# Altium PCB CT310高端控制盒核心板电路V1.3.PcbDoc (part 8 of 10)
Units mil, origin at the board's own origin, x right, y up, seen from the top; angles counter-clockwise.
Board outline 3735.76 x 4625 mil, 2 copper layers (TOP, BOTTOM), stack 10.4 mil thick; 198 components, 362 nets, 1085 pads, 352 vias.
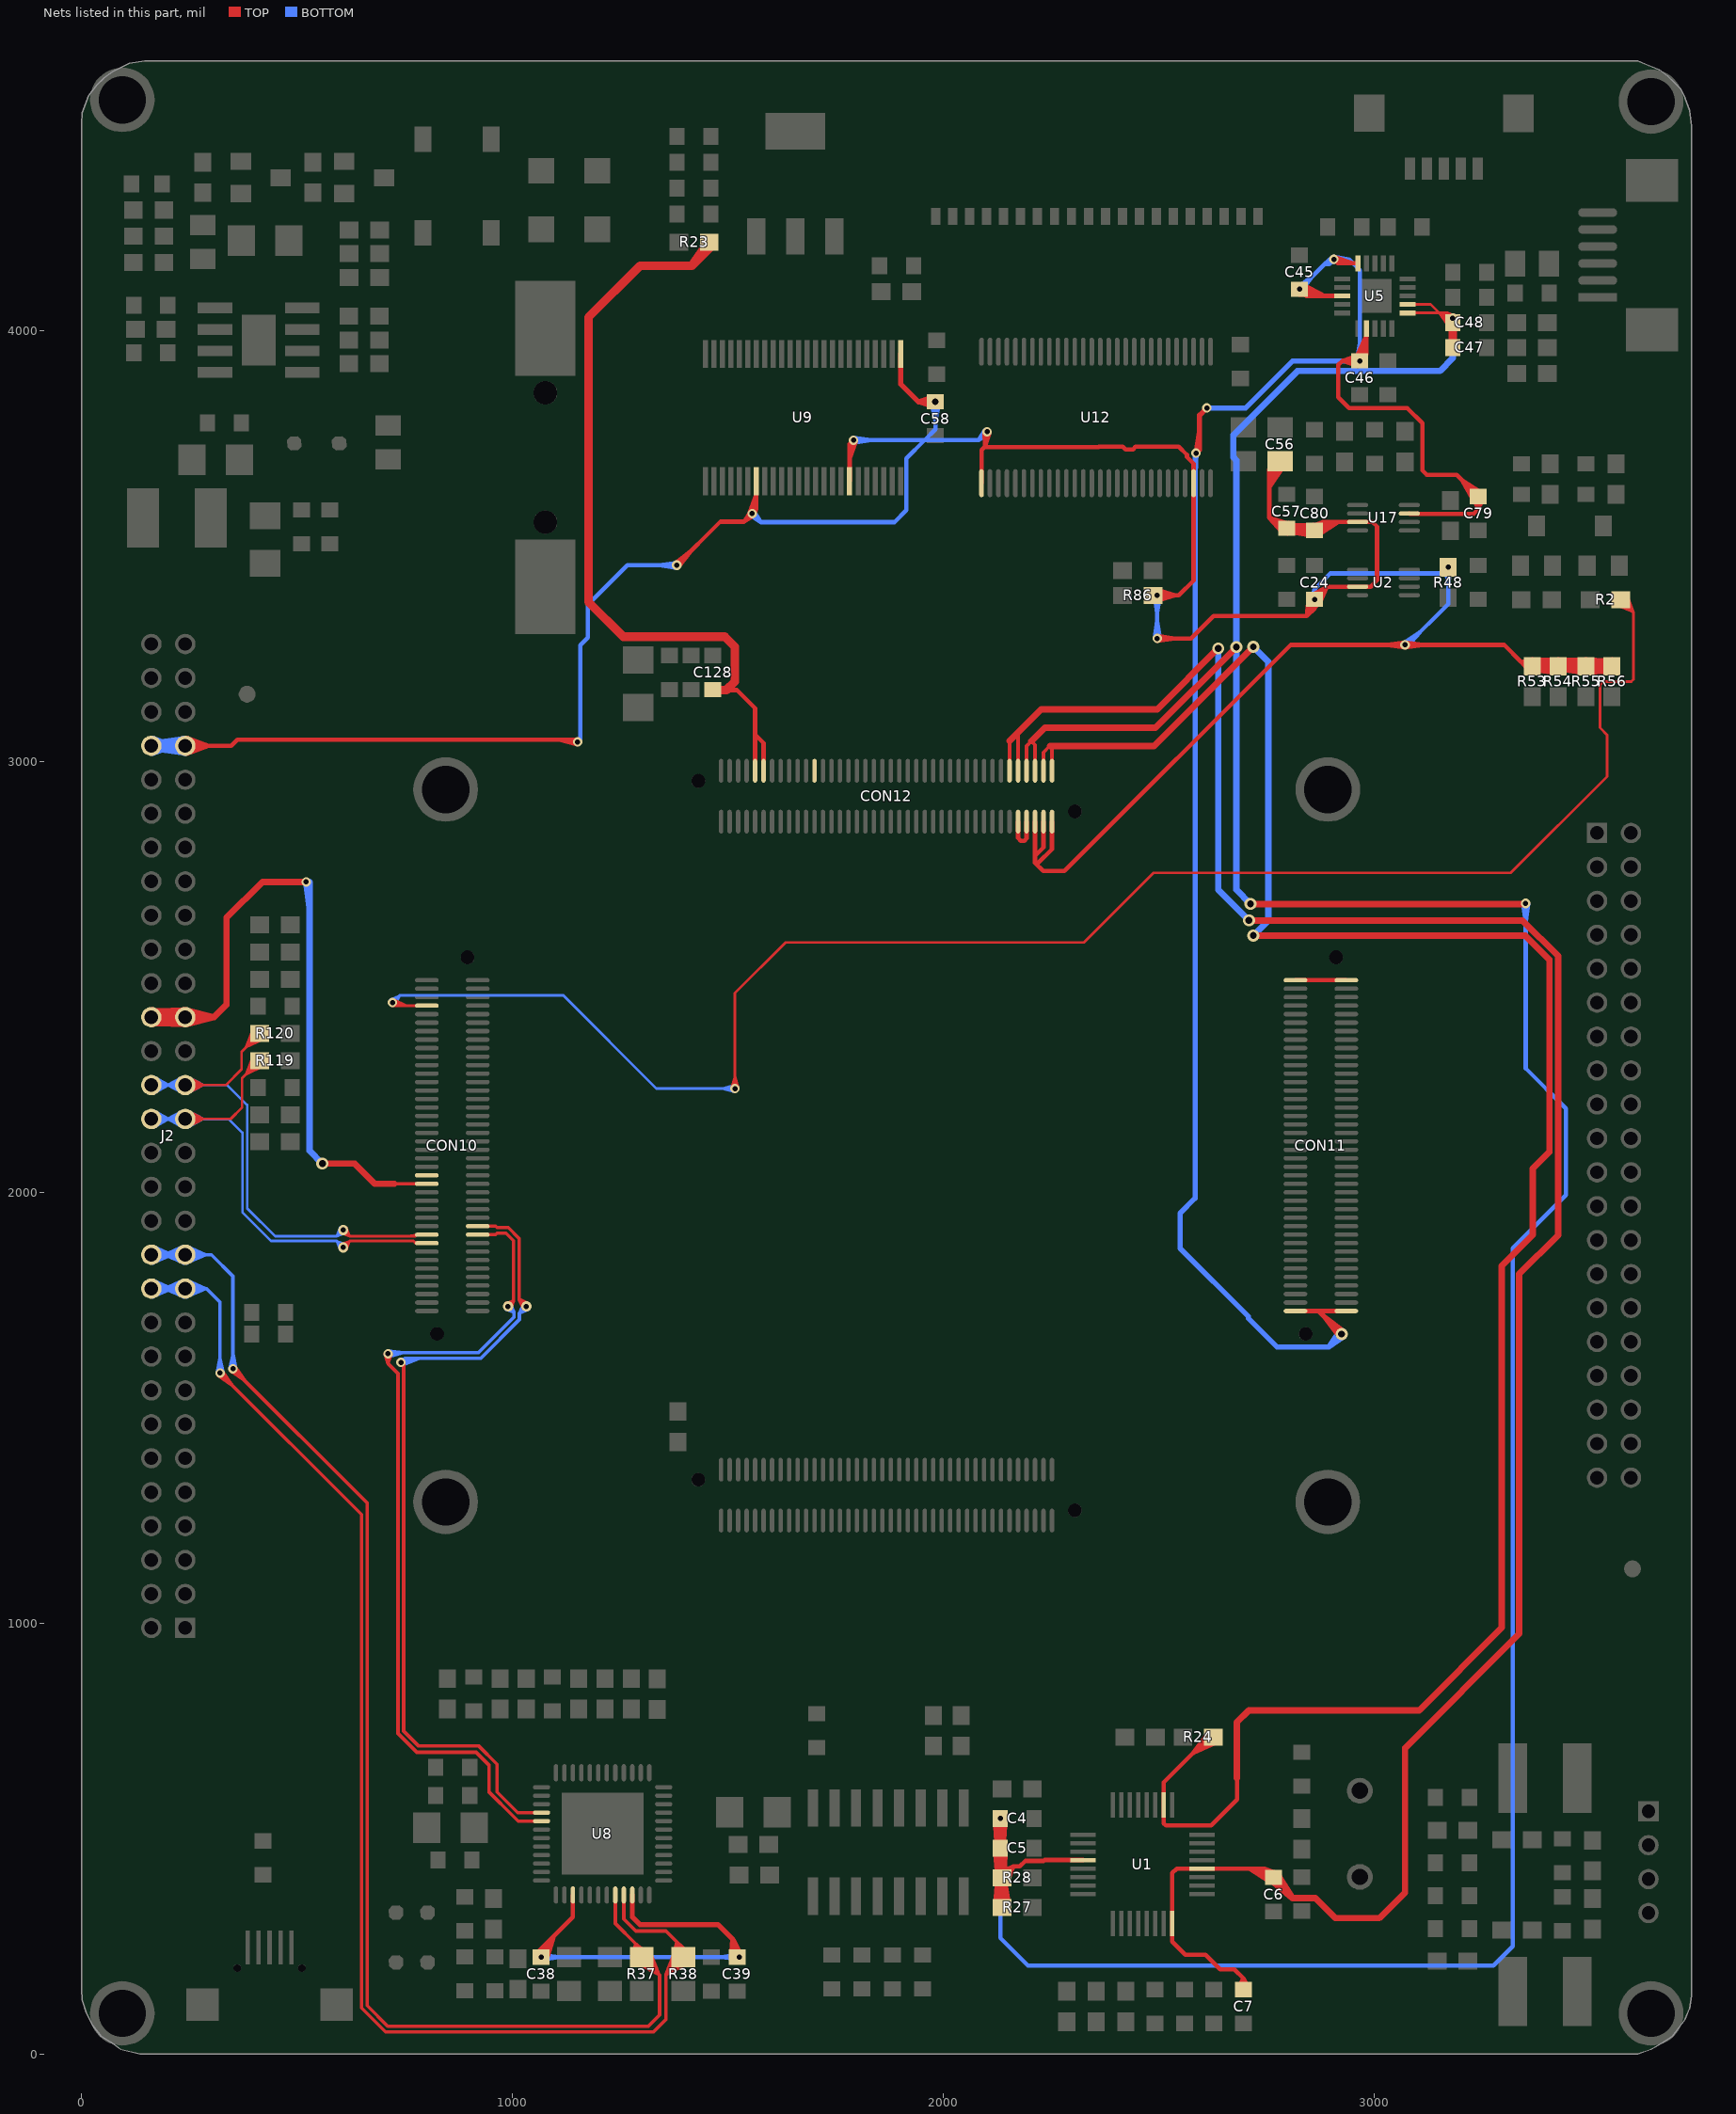
[diagram p8: the nets of this part, all layers, seen from the top]

## Via types
v1: diameter 22, hole 12, TOP to BOTTOM, tented both sides, 177 vias
v2: diameter 22, hole 12, TOP to BOTTOM, 89 vias
v3: diameter 28, hole 16, TOP to BOTTOM, 37 vias
v4: diameter 30, hole 20, TOP to BOTTOM, tented both sides, 26 vias
v5: diameter 24, hole 12, TOP to BOTTOM, 17 vias
v6: diameter 50, hole 30, TOP to BOTTOM, tented both sides, 5 vias
v7: diameter 40, hole 24, TOP to BOTTOM, 1 vias

## Nets (pads, with @x,y where several pads share a name; then routed paths per layer and width w, separated by ;. In a path a pad name is that pad's centre, name@x,y a point inside that pad or via, vN(x,y) a via of type N, cw(c..) or ccw(c..) an arc to the next point about the centre after c; other vN are vias at no path point) (continued)
TX+: J2.23 J2.24 R37.1 U8.8 | length 4265.4
  TOP w8: v1@346.27,1584.63 378.73,1562.03 v1@356.13,1594.49 ; v1(350.76,1590) 662.16,1278.6 662.16,111.83 709.99,64 1314.76,64 1340.76,90 1340.76,182.7 R37.1@1299.09,224.37 ; 1238.14,324.84 U8.8@1238.14,353.84 ; U8.8@1238.14,368.84 1238.14,302.62 1285.76,255 ; R37.1@1275.54,224.64 1285.76,255 ; R37.1@1283.61,223.03 1285.76,255 ; R37.1@1285.76,224.37 1285.76,255 ; R37.1@1291.06,208.82 1339.69,183.78 ; R37.1@1295.16,224.37 1285.76,255 ; R37.1@1295.28,215.71 1339.69,183.78 ; R37.1@1303.03,224.37 1339.69,183.78 ; R37.1@1305.46,229.74 1285.76,255 ; R37.1@1311.25,235.59 1285.76,255 ; R37.1@1312.43,231.2 1339.69,183.78 ; R37.1@1319.72,234.7 1339.69,183.78
  BOTTOM w8: J2.24@161.39,1854.78 J2.23@240.13,1854.78 300.98,1854.78 350.76,1805 v1@350.76,1600 ; J2.24@162.81,1843.24 209.01,1854.78 ; J2.24@162.81,1866.31 209.01,1854.78 ; J2.24@165.43,1835.58 209.01,1854.78 ; J2.24@165.43,1873.98 209.01,1854.78 ; J2.23@236.09,1835.58 192.51,1854.78 ; J2.23@236.09,1873.98 192.51,1854.78 ; J2.23@238.71,1843.24 192.51,1854.78 ; J2.23@238.71,1866.31 192.51,1854.78 ; J2.23@241.55,1843.24 287.75,1854.78 ; J2.23@241.55,1866.31 287.75,1854.78 ; J2.23@244.17,1835.58 287.75,1854.78 ; J2.23@244.17,1873.98 287.75,1854.78 ; v1@343.8,1590.7 350.76,1625 ; v1(350.76,1590) 350.76,1625 ; v1@357.72,1590.7 350.76,1625
TX-: J2.21 J2.22 R38.1 U8.9 | length 4291.1
  TOP w8: v1@316.27,1574.63 348.73,1552.03 v1@326.13,1584.49 ; v1(320.76,1580) 649.16,1251.6 649.16,106.45 704.61,51 1326.76,51 1355.76,80 1355.76,184.37 ; 1257.83,324.84 U8.9@1257.83,353.84 ; U8.9@1257.83,368.84 1257.83,312.93 1285.76,285 1355.76,285 1380.76,260 ; R38.1@1372.21,223.68 1380.76,260 ; R38.1@1375.1,234.63 1355.76,184.37 ; R38.1@1380.32,222.69 1380.76,260 ; R38.1@1380.76,224.37 1380.76,260 ; R38.1@1382.4,231.18 1355.76,184.37 ; R38.1@1395.76,224.37 1355.76,184.37 ; R38.1@1399.56,215.7 1355.76,184.37 ; R38.1@1402.25,229.5 1380.76,260 ; R38.1@1403.76,208.8 1355.76,184.37 ; R38.1@1408.37,234.91 1380.76,260 ; 1355.76,184.37 1391.82,224.37 1380.76,260
  BOTTOM w8: J2.22@161.39,1776.04 J2.21@240.13,1776.04 289.72,1776.04 320.76,1745 v1(320.76,1580) ; J2.22@162.81,1764.5 209.01,1776.04 ; J2.22@162.81,1787.57 209.01,1776.04 ; J2.22@165.43,1756.84 209.01,1776.04 ; J2.22@165.43,1795.24 209.01,1776.04 ; J2.21@236.09,1756.84 192.51,1776.04 ; J2.21@236.09,1795.24 192.51,1776.04 ; J2.21@238.71,1764.5 192.51,1776.04 ; J2.21@238.71,1787.57 192.51,1776.04 ; J2.21@241.55,1764.5 287.75,1776.04 ; J2.21@241.55,1787.57 287.75,1776.04 ; J2.21@244.17,1756.84 287.75,1776.04 ; J2.21@244.17,1795.24 287.75,1776.04 ; v1@313.8,1580.7 320.76,1615 v1@327.72,1580.7
UART_RING: CON12.58
UH_DM2: CON10.22 U8.40 | length 2239.9
  TOP w8: v1(740.76,1605) 746.76,1599 746.76,749 780.76,715 920.76,715 963.47,672.29 963.47,607.71 1011.4,559.78 U8.40@1066.88,559.78 ; CON10.22@918.77,1920.88 960.59,1920.88 ; CON10.22@941.27,1920.88 960.59,1920.88 ; 1022.88,559.78 U8.40@1051.88,559.78 ; v5@1025.09,1729.93 1014.61,1751.57 ; v5@1036.25,1741.09 1014.61,1751.57 ; 960.59,1920.88 963.93,1917.54 989.64,1917.54 1014.61,1892.57 1014.61,1751.57 ; 1014.61,1751.57 v5(1031.61,1734.57) 1014.61,1751.57
  BOTTOM w8: v1@739.78,1611.93 783.45,1614.57 ; v1@742.83,1598.31 783.45,1614.57 ; v5@1025.05,1739.14 1015.61,1718.57 ; v5@1036.18,1728 1015.61,1718.57 ; 783.45,1614.57 v1(740.76,1605) 750.33,1614.57 926,1614.57 1015.61,1704.19 1015.61,1718.57 ; 1015.61,1718.57 v5(1031.61,1734.57) 1015.61,1718.57
UH_DM3: CON10.19 J2.33 J2.34 R120.2 | length 2625.2
  TOP w6: J2.33@240.13,2248.48 334.24,2248.48 370.76,2285 370.76,2325.86 R120.2@413.18,2368.29 ; J2.33@241.02,2239.9 281.75,2248.48 ; J2.33@241.02,2257.05 281.75,2248.48 ; J2.33@242.7,2234.08 281.75,2248.48 ; J2.33@242.7,2262.87 281.75,2248.48 ; J2.33@245.24,2228.5 281.75,2248.48 ; J2.33@245.24,2268.46 281.75,2248.48 ; R120.2@397.12,2377.22 380.77,2335.87 ; R120.2@402.6,2374.61 380.77,2335.87 ; R120.2@407.63,2371.31 380.77,2335.87 ; R120.2@411.21,2368.29 380.77,2335.87 ; R120.2@414.45,2364.9 380.77,2335.87 ; R120.2@418.07,2360.09 380.77,2335.87 ; R120.2@421.02,2354.78 380.77,2335.87 ; v5@601.77,1904.74 621.37,1897.57 ; v5(606.61,1912.32) 621.37,1897.57 ; v5@614.2,1917.16 621.37,1897.57 ; 754.99,1897.57 CON10.19@778.16,1901.21 ; CON10.19@800.66,1901.21 798.29,1903.57 780.17,1903.57 775.17,1898.57 774.67,1898.57 773.67,1897.57 621.37,1897.57
  BOTTOM w6: J2.34@161.39,2248.48 J2.33@240.13,2248.48 337.28,2248.48 383.76,2202 383.76,1962.56 448.75,1897.57 591.86,1897.57 ; J2.34@162.28,2239.9 203.01,2248.48 ; J2.34@162.28,2257.05 203.01,2248.48 ; J2.34@163.96,2234.08 203.01,2248.48 ; J2.34@163.96,2262.87 203.01,2248.48 ; J2.34@166.5,2228.5 203.01,2248.48 ; J2.34@166.5,2268.46 203.01,2248.48 ; J2.33@235.02,2228.5 198.51,2248.48 ; J2.33@235.02,2268.46 198.51,2248.48 ; J2.33@237.56,2234.08 198.51,2248.48 ; J2.33@237.56,2262.87 198.51,2248.48 ; J2.33@239.24,2239.9 198.51,2248.48 ; J2.33@239.24,2257.05 198.51,2248.48 ; J2.33@241.02,2239.9 281.75,2248.48 ; J2.33@241.02,2257.05 281.75,2248.48 ; J2.33@242.7,2234.08 281.75,2248.48 ; J2.33@242.7,2262.87 281.75,2248.48 ; J2.33@245.24,2228.5 281.75,2248.48 ; J2.33@245.24,2268.46 281.75,2248.48 ; v5@599.03,1917.16 591.86,1897.57 ; v5@611.46,1904.74 591.86,1897.57 ; 591.86,1897.57 v5(606.61,1912.32) 591.86,1897.57
UH_DP2: CON10.20 U8.41 | length 2219.5
  TOP w8: v1@703.84,1623.93 710.76,1602 ; v1(710.76,1625) 710.76,1602 ; v1@717.68,1623.93 710.76,1602 ; CON10.20@918.77,1901.21 960.59,1901.21 ; CON10.20@941.27,1901.21 960.59,1901.21 ; v5@984.71,1741.35 1001.61,1747.23 ; v5(988.96,1734.57) 1001.61,1747.23 ; v5@995.73,1730.32 1001.61,1747.23 ; 1022.88,540.1 U8.41@1051.88,540.1 ; U8.41@1066.88,540.1 1012.7,540.1 1000.76,552.04 945.42,607.38 944.76,608.04 944.76,670.5 915.26,700 777.38,700 733.76,743.62 733.76,1579 710.76,1602 ; 960.59,1901.21 963.93,1904.54 984.26,1904.54 1001.61,1887.19 1001.61,1747.23
  BOTTOM w8: v1(710.76,1625) 746.51,1627.57 ; v1@710.94,1632 746.51,1627.57 ; v1@711.94,1618.1 746.51,1627.57 ; v1@718.19,1627.57 920.61,1627.57 1002.61,1709.57 1002.61,1720.91 ; v5@984.59,1727.87 1002.61,1720.91 ; v5(988.96,1734.57) 1002.61,1720.91 ; v5@995.66,1738.93 1002.61,1720.91
UH_DP3: CON10.17 J2.31 J2.32 R119.2 | length 2614.3
  TOP w6: J2.31@240.97,2178.32 281.75,2170 ; J2.31@241.08,2161.17 281.75,2170 ; J2.31@242.61,2184.15 281.75,2170 ; J2.31@242.79,2155.36 281.75,2170 ; J2.31@245.11,2189.75 281.75,2170 ; J2.31@245.36,2149.79 281.75,2170 ; R119.2@397.12,2314.3 380.77,2272.94 ; R119.2@402.6,2311.68 380.77,2272.94 ; R119.2@407.63,2308.38 380.77,2272.94 ; R119.2@411.21,2305.36 380.77,2272.94 ; R119.2@413.18,2305.36 371.79,2263.97 371.79,2196.03 345.76,2170 240.39,2170 J2.31@240.13,2169.74 281.75,2170 ; R119.2@414.45,2301.97 380.77,2272.94 ; R119.2@418.07,2297.16 380.77,2272.94 ; R119.2@421.02,2291.86 380.77,2272.94 ; v5@601.77,1879.41 621.36,1886.57 ; v5(606.61,1871.82) 621.36,1886.57 ; v5@614.2,1866.98 621.36,1886.57 ; CON10.17@778.16,1881.51 769.61,1886.57 ; CON10.17@800.66,1881.51 774.67,1881.51 769.61,1886.57 ; 621.36,1886.57 769.61,1886.57
  BOTTOM w6: J2.32@161.39,2169.74 J2.31@240.13,2169.74 341.02,2169.74 372.76,2138 372.76,1953 439.19,1886.57 591.86,1886.57 ; J2.32@162.28,2161.16 203.01,2169.74 ; J2.32@162.28,2178.31 203.01,2169.74 ; J2.32@163.96,2155.34 203.01,2169.74 ; J2.32@163.96,2184.13 203.01,2169.74 ; J2.32@166.5,2149.76 203.01,2169.74 ; J2.32@166.5,2189.72 203.01,2169.74 ; J2.31@235.02,2149.76 198.51,2169.74 ; J2.31@235.02,2189.72 198.51,2169.74 ; J2.31@237.56,2155.34 198.51,2169.74 ; J2.31@237.56,2184.13 198.51,2169.74 ; J2.31@239.24,2161.16 198.51,2169.74 ; J2.31@239.24,2178.31 198.51,2169.74 ; J2.31@241.02,2161.16 281.75,2169.74 ; J2.31@241.02,2178.31 281.75,2169.74 ; J2.31@242.7,2155.34 281.75,2169.74 ; J2.31@242.7,2184.13 281.75,2169.74 ; J2.31@245.24,2149.76 281.75,2169.74 ; J2.31@245.24,2189.72 281.75,2169.74 ; v5@599.03,1866.98 591.86,1886.57 ; v5@611.46,1879.41 591.86,1886.57 ; 591.86,1886.57 v5(606.61,1871.82) 591.86,1886.57
V_BKCOIN: C128.1 CON12.70 CON12.72 R23.1 | length 2022.2
  TOP w10: 1505.86,3165.2 1520.56,3165.2 1562.47,3123.29 1562.47,3061.71 ; CON12.72@1562.47,2977.98 1562.47,3061.71 ; CON12.72@1562.47,3000.48 1562.47,3035.48 ; CON12.70@1582.16,2977.98 1582.16,3042.02 1562.47,3061.71 ; CON12.70@1582.16,3000.48 1582.16,3035.48
  TOP w20: R23.1@1454.22,4205 1415.76,4150 ; R23.1@1456.19,4205 1456.19,4190.43 1415.76,4150 ; C128.1@1464.61,3165.2 1495.96,3165.2 ; C128.1@1466.58,3166.52 1495.96,3165.2 ; 1415.76,4150 1295.76,4150 1175.76,4030 1175.76,3370 1256.76,3289 1492.17,3289 1515.76,3265.41 1515.76,3185 1495.96,3165.2
VDD1V8_EXT: C24.1 C56.1 C57.1 C58.1 C80.1 CON12.1 CON12.3 CON12.5 J2.53 J2.54 R48.1 R53.1 R54.1 R55.1 R56.1 R86.1 U2.3 U9.1 U9.31 U9.42 U12.1 U12.26 U17.3 | length 19943.9
  TOP w10: J2.53@240.13,3035.88 346.64,3035.88 360.76,3050 1145.76,3050 v1(1150.76,3045) 1107.99,3050 ; J2.53@240.82,3027.29 293.75,3035.88 ; J2.53@240.82,3044.47 293.75,3035.88 ; J2.53@243.36,3017.54 293.75,3035.88 ; J2.53@243.36,3054.22 293.75,3035.88 ; v1@1149.65,3039.1 1107.99,3050 ; v1@1151.04,3050.99 1107.99,3050 ; v1@1376.81,3459.51 1412.97,3487.21 v1@1385.27,3451.05 ; v1(1380.76,3455) 1481.76,3556 1536.76,3556 ; v1@1550,3576.67 U9.31@1565.34,3618.71 ; v1@1550,3576.69 U9.31@1565.34,3618.26 ; v1@1551.07,3578.74 1536.76,3556 ; v1@1551.78,3579.49 1565.34,3587.5 ; v1@1559.5,3570.31 1536.76,3556 ; v1@1561.13,3572.32 1565.34,3587.5 ; U9.31@1565.34,3623.5 1565.34,3587.5 ; U9.31@1565.34,3650 1565.34,3584.58 v1(1555.76,3575) ; U9.42@1781.89,3650 1781.89,3736.13 v1(1790.76,3745) 1781.89,3701.49 ; U9.42@1781.89,3676.5 1781.89,3712.5 ; v1@1784.81,3745.8 1781.89,3701.49 ; v1@1796.54,3743.41 1781.89,3701.49 ; U12.1@2087.87,3645.4 2087.87,3722.11 2095.76,3730 ; U12.1@2087.87,3672.56 2087.87,3707.88 ; v1@2094.77,3765.34 2095.76,3730 ; v1@2106.61,3763.65 2095.76,3730 ; 2212.08,2802.36 CON12.5@2212.08,2837.36 ; CON12.5@2212.08,2859.86 2212.08,2780 ; 2231.76,2802.36 CON12.3@2231.76,2837.36 ; CON12.3@2231.76,2859.86 2231.76,2799.68 2212.08,2780 ; 2251.45,2802.36 CON12.1@2251.45,2837.36 ; CON12.1@2251.45,2859.86 2251.45,2795.69 2219.44,2763.68 2212.08,2763.68 ; R86.1@2486.19,3385 v1(2495.76,3385) ; R86.1@2488.16,3385 2537.85,3385 ; R86.1@2489.84,3384.03 R86.1@2490.33,3399.52 ; R86.1@2489.84,3385.97 R86.1@2490.33,3370.48 ; v1(2495.76,3285) 2573.99,3285 2625.99,3337 2842.76,3337 ; v1@2496.2,3279.02 2536.76,3285 v1@2496.2,3290.98 ; R86.1@2500.87,3381.85 R86.1@2490.33,3370.48 ; R86.1@2500.87,3388.15 R86.1@2490.33,3399.52 ; 2579.99,3582.92 U12.26@2579.99,3618.23 ; U12.26@2579.99,3672.56 2579.99,3691.07 ; C56.1@2756.46,3699.44 2755.76,3635.25 ; C56.1@2766.47,3698.54 2755.76,3635.25 ; C56.1@2780.76,3696.54 2755.76,3671.54 ; C56.1@2782.9,3693.42 2755.76,3635.25 ; C57.1@2785.49,3531 2755.76,3565 ; C56.1@2791.64,3688.48 2755.76,3635.25 ; C57.1@2793.79,3540.63 2755.76,3565 ; C57.1@2797.73,3540.63 C80.1@2845.85,3535.63 ; C57.1@2798.09,3527.92 C80.1@2845.85,3535.63 ; C57.1@2799.08,3552.2 2755.76,3565 ; C57.1@2800.69,3553 C80.1@2845.85,3535.63 ; C80.1@2853.82,3523.93 C57.1@2810.92,3549.06 ; C24.1@2854.91,3385.66 2890.29,3405.16 ; C80.1@2855.65,3547.95 C57.1@2810.95,3529.99 ; C80.1@2856.16,3523.19 C57.1@2811.01,3539.25 ; C80.1@2857.1,3523.03 C57.1@2811.07,3535.63 ; C80.1@2857.1,3548.23 C57.1@2811.07,3535.63 ; C80.1@2858.06,3548.33 C57.1@2811.01,3539.25 ; C24.1@2858.34,3370.14 C24.1@2846.44,3378.66 ; C80.1@2858.6,3522.91 C57.1@2810.95,3529.99 ; C24.1@2858.79,3375.63 2842.76,3337 ; C24.1@2858.95,3369.91 C24.1@2873.27,3368.52 ; C80.1@2859.71,3547.98 2915.93,3555.16 ; C80.1@2860.63,3548.21 C57.1@2810.92,3549.06 ; C24.1@2860.77,3381.63 C24.1@2846.44,3378.66 ; C24.1@2862.73,3375.63 2890.29,3405.16 ; C24.1@2864.74,3380.12 C24.1@2873.27,3368.52 ; C80.1@2868.42,3524.26 2915.93,3555.16 ; C24.1@2869.66,3369.03 2842.76,3337 ; 2906.11,3405.16 U2.3@2941.04,3405.16 ; 2906.11,3555.16 U17.3@2941.04,3555.16 ; U2.3@2980.41,3405.16 2990.92,3405.16 ; U17.3@2980.41,3555.16 2995.6,3555.16 ; v1@3070.32,3264.02 3029.76,3270 ; v1@3070.32,3275.98 3029.76,3270 ; v1@3071.2,3264.02 3111.76,3270 v1@3071.2,3275.98 ; R53.1@3357.54,3210.23 3340.76,3230.43 ; R53.1@3365.56,3237.09 R54.1@3417.33,3230.43 ; R53.1@3366.16,3237.08 3340.76,3230.43 ; R53.1@3370.04,3208.35 R54.1@3417.33,3230.43 ; R54.1@3420.01,3208.89 R53.1@3375.53,3235.8 ; R54.1@3421.42,3232.49 R53.1@3373.68,3210.05 ; R54.1@3421.45,3208.36 R53.1@3374.63,3230.43 ; R54.1@3422.85,3206.04 R53.1@3373.23,3223.56 ; R54.1@3424.58,3235.07 R53.1@3373.23,3223.56 ; R54.1@3425.56,3237.09 R55.1@3477.06,3230.43 ; R54.1@3425.76,3218.46 R53.1@3373.68,3210.05 ; R54.1@3425.76,3220.43 R53.1@3373.23,3223.56 ; R54.1@3425.96,3237.09 R53.1@3374.63,3230.43 ; R54.1@3426.06,3203.78 R53.1@3373.68,3210.05 ; R54.1@3427.5,3236.98 R53.1@3375.53,3235.8 ; R54.1@3430.06,3208.36 R55.1@3477.06,3230.43 ; R55.1@3485.23,3208.8 R54.1@3439.59,3235.27 ; R55.1@3486.48,3208.35 R54.1@3439.24,3230.43 ; R55.1@3486.91,3232.64 R54.1@3436.19,3211.24 ; R55.1@3487.81,3206.05 R54.1@3436.41,3224.07 ; R55.1@3489.48,3237.03 R56.1@3541.43,3234.2 ; R55.1@3489.76,3235.08 R54.1@3436.41,3224.07 ; R55.1@3489.96,3203.8 R56.1@3542.55,3208.3 ; R55.1@3490.51,3237.08 3530.76,3230.43 ; R55.1@3490.73,3203.78 R54.1@3436.19,3211.24 ; R55.1@3490.96,3237.09 R54.1@3439.24,3230.43 ; R55.1@3492.33,3237 R54.1@3439.59,3235.27 ; R55.1@3492.41,3235.02 R56.1@3543.4,3221.86 ; R55.1@3493.2,3205.95 R56.1@3543.4,3221.86 ; R55.1@3495.57,3232.34 R56.1@3542.55,3208.3 ; R55.1@3496.08,3208.71 R56.1@3541.43,3234.2 ; R55.1@3496.19,3208.76 3530.76,3230.43 ; R56.1@3540.97,3211.45 3530.76,3230.43 ; R56.1@3545.99,3206.55 R55.1@3499.09,3230.43 ; R56.1@3550.76,3220.43 R55.1@3499.09,3230.43 ; R56.1@3550.76,3222.4 3530.76,3230.43 ; R56.1@3551.26,3237.08 3530.76,3230.43 ; R56.1@3551.51,3235.1 R55.1@3499.09,3230.43 ; 1536.76,3556 v1(1555.76,3575) ; 1536.76,3556 v1(1555.76,3575) ; v1(1555.76,3575) U9.31@1565.34,3618.71 ; v1(1555.76,3575) 1565.34,3587.5 ; v1(1555.76,3575) U9.31@1565.34,3618.26 ; U9.31@1565.34,3618.26 1561.69,3574.1 U9.31@1565.34,3618.71 ; 2095.76,3730 v1(2100.76,3765) 2095.76,3760 2095.76,3730 ; 2095.76,3730 2096.76,3729 2359.46,3729 2360.46,3730 2416.06,3730 2422.06,3724 2439.46,3724 2445.46,3730 2545.76,3730 2564.76,3711 2564.76,3706.3 2579.99,3691.07 ; 2212.08,2763.68 2230.76,2745 2280.46,2745 2805.46,3270 v1(3070.76,3270) ; 2212.08,2763.68 2212.08,2780 ; R86.1@2490.33,3370.48 v1(2495.76,3385) ; R86.1@2490.33,3370.48 2537.85,3385 ; R86.1@2490.33,3399.52 v1(2495.76,3385) ; R86.1@2490.33,3399.52 2537.85,3385 ; v1(2495.76,3385) 2537.85,3385 ; v1(2495.76,3385) 2536.76,3385 ; v1(2495.76,3385) 2537.85,3385 ; v1(2495.76,3385) 2545.76,3385 2579.99,3419.23 U12.26@2579.99,3645.4 2579.99,3691.07 ; R86.1@2496.2,3379.02 2536.76,3385 ; R86.1@2496.19,3379.02 2537.85,3385 ; R86.1@2496.2,3379.02 2536.76,3385 ; R86.1@2496.19,3379.02 2537.85,3385 ; R86.1@2496.2,3390.98 2536.76,3385 ; R86.1@2496.19,3390.98 2537.85,3385 ; R86.1@2496.2,3390.98 2536.76,3385 ; R86.1@2496.19,3390.98 2537.85,3385 ; 2755.76,3565 2780.13,3540.63 C57.1@2795.76,3540.63 2800.76,3535.63 C80.1@2860.76,3535.63 2880.29,3555.16 ; 2755.76,3565 2755.76,3671.54 ; 2755.76,3635.25 C56.1@2774.85,3696.54 ; 2755.76,3671.54 C56.1@2774.85,3696.54 ; 2755.76,3671.54 2767.35,3700.78 2755.76,3671.54 ; 2755.76,3671.54 2780.92,3690.41 2755.76,3671.54 ; 2755.76,3671.54 2757.37,3702.95 2755.76,3671.54 ; 2755.76,3671.54 2785.64,3681.36 2755.76,3671.54 ; 2755.76,3671.54 C56.1@2774.85,3696.54 ; C57.1@2810.92,3549.06 C80.1@2858.79,3535.63 ; C57.1@2810.95,3529.99 C80.1@2858.79,3535.63 ; C57.1@2811.01,3539.25 C80.1@2858.79,3535.63 ; C57.1@2811.07,3535.63 C80.1@2858.79,3535.63 ; 2842.76,3337 v1(2860.76,3375.63) ; 2842.76,3337 C24.1@2855.16,3377.77 ; 2842.76,3337 C24.1@2866.01,3372.72 ; 2842.76,3337 v1(2860.76,3375.63) ; 2842.76,3337 C24.1@2855.16,3377.77 ; 2842.76,3337 C24.1@2866.01,3372.72 ; 2842.76,3337 C24.1@2846.44,3378.66 ; 2842.76,3337 2860.76,3355 ; 2842.91,3337.35 v1(2860.76,3375.63) ; 2842.91,3337.35 C24.1@2855.16,3377.77 ; 2842.91,3337.35 C24.1@2866,3372.71 ; C24.1@2846.44,3378.66 v1(2860.76,3375.63) ; C24.1@2848.66,3371.71 v1(2860.76,3375.63) ; C24.1@2848.66,3371.71 2857.62,3380.74 C24.1@2848.66,3371.71 ; C24.1@2848.66,3371.71 2861.21,3369.65 C24.1@2848.66,3371.71 ; C24.1@2848.66,3371.71 v1(2860.76,3375.63) ; C24.1@2848.66,3371.71 2860.76,3355 ; C24.1@2848.66,3371.71 2860.76,3355 ; C24.1@2854.82,3374.76 2860.76,3355 ; C24.1@2854.82,3374.76 2860.76,3355 ; C24.1@2854.82,3374.76 2860.76,3355 ; C24.1@2854.82,3374.76 2860.76,3355 ; C24.1@2854.82,3374.76 2860.76,3355 ; C24.1@2854.82,3374.76 2860.76,3355 ; C24.1@2854.82,3374.76 2860.76,3355 ; C24.1@2856.83,3380.17 2890.29,3405.16 ; C24.1@2856.83,3380.17 2890.29,3405.16 ; C24.1@2856.83,3380.17 2890.29,3405.16 ; C24.1@2856.83,3380.17 2890.29,3405.16 ; 2860.76,3355 v1(2860.76,3375.63) ; 2860.76,3355 C24.1@2866.7,3374.76 ; 2860.76,3355 v1(2860.76,3375.63) ; 2860.76,3355 C24.1@2866.7,3374.76 ; 2860.76,3355 v1(2860.76,3375.63) ; 2860.76,3355 C24.1@2866.7,3374.76 ; 2860.76,3355 v1(2860.76,3375.63) ; 2860.76,3355 C24.1@2866.7,3374.76 ; 2860.76,3355 v1(2860.76,3375.63) ; 2860.76,3355 C24.1@2866.7,3374.76 ; 2860.76,3355 v1(2860.76,3375.63) ; 2860.76,3355 C24.1@2866.7,3374.76 ; 2860.76,3355 v1(2860.76,3375.63) ; 2860.76,3355 C24.1@2866.7,3374.76 ; 2860.76,3355 v1(2860.76,3375.63) ; 2860.76,3355 C24.1@2872.86,3371.71 ; 2860.76,3355 v1(2860.76,3375.63) ; 2860.76,3355 C24.1@2872.86,3371.71 ; 2860.76,3355 v1(2860.76,3375.63) ; v1(2860.76,3375.63) 2890.29,3405.16 ; v1(2860.76,3375.63) C24.1@2873.27,3368.52 ; v1(2860.76,3375.63) 2890.29,3405.16 ; v1(2860.76,3375.63) 2890.29,3405.16 ; v1(2860.76,3375.63) C24.1@2872.86,3371.71 ; v1(2860.76,3375.63) C24.1@2872.86,3371.71 ; v1(2860.76,3375.63) 2890.29,3405.16 ; C80.1@2862.73,3535.63 2880.29,3555.16 ; C80.1@2862.73,3535.63 2915.93,3555.16 ; C80.1@2862.73,3535.63 2880.29,3555.16 ; C24.1@2865.3,3371.7 2890.29,3405.16 ; C24.1@2865.3,3371.7 2890.29,3405.16 ; C24.1@2865.3,3371.7 2890.29,3405.16 ; C24.1@2865.3,3371.7 2890.29,3405.16 ; C24.1@2872.86,3371.71 2860.31,3369.65 C24.1@2872.86,3371.71 ; C24.1@2872.86,3371.71 2863.9,3380.74 C24.1@2872.86,3371.71 ; C24.1@2873.27,3368.52 2890.29,3405.16 ; 2880.29,3555.16 2873.96,3529.67 2880.29,3555.16 ; 2880.29,3555.16 2855.61,3546.17 2880.29,3555.16 ; 2880.29,3555.16 U17.3@2960.72,3555.16 2995.6,3555.16 ; 2890.29,3405.16 U2.3@2960.72,3405.16 2990.92,3405.16 ; 2990.92,3405.16 3005.76,3420 3005.76,3545 2995.6,3555.16 ; 3029.76,3270 v1(3070.76,3270) ; v1(3070.76,3270) 3301.19,3270 3340.76,3230.43 ; 3340.76,3230.43 3365.76,3222.4 R54.1@3417.33,3230.43 ; 3340.76,3230.43 3530.76,3230.43 ; R53.1@3374.63,3230.43 R54.1@3425.76,3222.4 ; R53.1@3375.53,3235.8 R54.1@3425.76,3222.4 ; R54.1@3425.76,3222.4 R55.1@3477.06,3230.43 ; R54.1@3436.19,3211.24 3490.76,3218.46 R56.1@3542.55,3208.3 ; R54.1@3436.41,3224.07 R55.1@3490.76,3220.43 R56.1@3543.4,3221.86 ; R54.1@3439.24,3230.43 R55.1@3490.76,3222.4 ; R54.1@3439.59,3235.27 R55.1@3490.76,3222.4 ; R55.1@3490.76,3222.4 R56.1@3541.43,3234.2 ; R55.1@3490.76,3222.4 3530.76,3230.43
  TOP w12: 1900,3876.78 U9.1@1900,3918.78 ; U9.1@1900,3945.28 1900,3875.76 1941.39,3834.37 ; C58.1@1976.96,3822.8 1941.39,3834.37 ; C58.1@1976.96,3845.94 1941.39,3834.37 ; C58.1@1978.79,3834.37 1941.39,3834.37 ; 1941.39,3834.37 v3(1980.76,3834.37) ; 1941.39,3834.37 C58.1@1979.95,3842.33 ; 1941.39,3834.37 C58.1@1979.95,3826.41 ; 1941.39,3834.37 v3(1980.76,3834.37) ; 1941.39,3834.37 C58.1@1979.95,3842.33 ; 1941.39,3834.37 C58.1@1979.95,3826.41 ; 1941.39,3834.37 v3(1980.76,3834.37) ; 1941.39,3834.37 C58.1@1979.95,3842.33 ; 1941.39,3834.37 C58.1@1979.95,3826.41 ; 1941.39,3834.37 C58.1@1979.95,3842.33 ; 1941.39,3834.37 C58.1@1979.95,3826.41 ; 1941.39,3834.37 v3(1980.76,3834.37)
  BOTTOM w10: J2.54@161.39,3035.88 J2.53@240.13,3035.88 ; J2.54@162.08,3027.29 215.01,3035.88 ; J2.54@162.08,3044.47 215.01,3035.88 ; J2.54@164.62,3017.54 215.01,3035.88 ; J2.54@164.62,3054.22 215.01,3035.88 ; J2.53@233.53,3018.47 185.17,3046.74 ; J2.53@233.53,3053.29 185.17,3025.02 ; J2.53@235.36,3017.88 186.12,3040.57 ; J2.53@235.36,3053.88 186.12,3031.19 ; J2.53@236.9,3017.54 186.51,3035.88 ; J2.53@236.9,3054.22 186.51,3035.88 ; J2.53@237.81,3027.58 185.17,3046.74 ; J2.53@237.81,3044.19 185.17,3025.02 ; J2.53@238.53,3017.33 186.12,3031.19 ; J2.53@238.53,3054.43 186.12,3040.57 ; J2.53@238.7,3027.38 186.12,3040.57 ; J2.53@238.7,3044.38 186.12,3031.19 ; J2.53@239.44,3027.29 186.51,3035.88 ; J2.53@239.44,3044.47 186.51,3035.88 ; J2.53@240.19,3027.26 186.12,3031.19 ; J2.53@240.19,3044.5 186.12,3040.57 ; J2.53@240.65,3017.27 185.17,3025.02 ; J2.53@240.65,3054.5 185.17,3046.74 ; J2.53@241.15,3027.32 185.17,3025.02 ; J2.53@241.15,3044.44 185.17,3046.74 ; v1(1150.76,3045) 1156.76,3051 1156.76,3269.73 1174.26,3287.23 1174.26,3363.5 1265.76,3455 v1(1380.76,3455) ; v1@1380.32,3449.02 1339.76,3455 v1@1380.32,3460.98 ; v1@1551.99,3570.33 1575.76,3555 ; v1(1555.76,3575) 1575.76,3555 ; v1@1560.43,3578.77 1575.76,3555 ; v1(1790.76,3745) 1955.51,3745 ; v1@1791.2,3739.02 1831.76,3745 v1@1791.2,3750.98 ; v3@1971.81,3833.45 1980.76,3790.37 v3@1989.71,3833.45 ; v3(1980.76,3834.37) 1980.76,3770.25 1955.51,3745 ; v1@2096.09,3768.77 2080.76,3745 ; v1@2104.53,3760.33 2080.76,3745 ; v1@2489.78,3285.44 2495.76,3326 v1@2501.74,3285.44 ; v1@2489.78,3384.56 2495.76,3344 v1@2501.74,3384.56 ; v1(2495.76,3285) v1(2495.76,3385) ; v1@2854.81,3376.37 2860.76,3400 ; v1(2860.76,3375.63) 2860.76,3400 ; v1@2866.71,3376.37 2860.76,3400 ; v1@3067.17,3274.8 3105.49,3299.73 ; v1@3074.95,3265.71 3105.49,3299.73 ; v1@3164.78,3449.99 3170.76,3409.43 ; v1@3165.94,3454.01 3156.33,3436 ; v1@3174.33,3445.61 3156.33,3436 ; v1@3176.74,3449.99 3170.76,3409.43 ; 185.17,3025.02 J2.53@240.13,3035.88 ; 185.17,3046.74 J2.53@240.13,3035.88 ; 186.12,3031.19 J2.53@240.13,3035.88 ; 186.12,3040.57 J2.53@240.13,3035.88 ; 215.01,3035.88 J2.53@240.13,3035.88 ; 215.01,3035.88 J2.53@238.65,3044.37 ; 215.01,3035.88 J2.53@238.65,3027.39 ; 215.01,3035.88 J2.53@233.23,3053.18 ; 215.01,3035.88 J2.53@233.23,3018.59 ; 215.01,3035.88 J2.53@240.13,3035.88 ; 215.01,3035.88 J2.53@238.65,3044.37 ; 215.01,3035.88 J2.53@238.65,3027.39 ; 215.01,3035.88 J2.53@233.23,3053.18 ; 215.01,3035.88 J2.53@233.23,3018.59 ; 215.01,3035.88 J2.53@240.13,3035.88 ; 215.01,3035.88 J2.53@238.65,3044.37 ; 215.01,3035.88 J2.53@238.65,3027.39 ; 215.01,3035.88 J2.53@233.23,3053.18 ; 215.01,3035.88 J2.53@233.23,3018.59 ; 215.01,3035.88 J2.53@240.13,3035.88 ; 215.01,3035.88 J2.53@238.65,3044.37 ; 215.01,3035.88 J2.53@238.65,3027.39 ; 215.01,3035.88 J2.53@233.23,3053.18 ; 215.01,3035.88 J2.53@233.23,3018.59 ; 1575.76,3555 1885.76,3555 1913.76,3583 1913.76,3703.25 1955.51,3745 ; 1955.51,3745 2080.76,3745 ; 2080.76,3745 v1(2100.76,3765) 2080.76,3745 ; 2860.76,3400 2896.76,3436 3156.33,3436 ; 3105.49,3299.73 v1(3070.76,3270) 3075.76,3270 3170.76,3365 v1(3170.76,3450.43) ; 3156.33,3436 v1(3170.76,3450.43) ; 3156.33,3436 v1(3170.76,3450.43) ; 3170.76,3409.43 v1(3170.76,3450.43)
VDD12_5M: CON12.7 CON12.9 | length 134.1
  TOP w10: CON12.9@2172.71,2837.36 2172.71,2821.48 ; CON12.9@2172.71,2859.86 2172.71,2821.48 ; CON12.7@2192.39,2837.36 2192.39,2820.86 ; CON12.7@2192.39,2859.86 2192.39,2820.86 ; 2172.71,2821.48 2178.61,2815.57 2187.1,2815.57 2192.39,2820.86
VDD18_A31: CON10.33
VDD18_CAM: C4.2 C5.2 C47.2 C48.2 CON12.6 CON12.8 R27.2 R28.2 U1.20 U5.11 U5.12 | length 14511.1
  TOP w6: U5.11@3076.55,4040.63 3150.13,4040.63 ; U5.12@3076.55,4060.32 3130.44,4060.32 3150.13,4040.63 ; U5.11@3089.34,4040.63 3113.25,4040.63 ; U5.12@3089.34,4060.32 3113.25,4060.32 ; C48.2@3171.09,4009.79 3150.13,4040.63 ; C48.2@3175.82,4013.6 3150.13,4040.63 ; C48.2@3177.4,4021.4 3152.89,4040.13 ; C48.2@3177.46,4021.36 3153.66,4039.37 ; C48.2@3177.65,4021.26 3152.43,4039.13 ; C48.2@3183.19,4036.13 3152.43,4039.13 ; C48.2@3183.33,4036.1 3153.66,4039.37 ; C48.2@3183.47,4036.06 3152.89,4040.13 ; C48.2@3185.26,4028.11 3150.13,4040.63 ; C48.2@3186.82,4033.98 3150.13,4040.63 ; 3150.13,4040.63 C48.2@3181.39,4020.3 ; 3150.13,4040.63 3169.09,4040.63 ; 3152.43,4039.13 v1(3181.39,4028.33) ; 3152.89,4040.13 v1(3181.39,4028.33) ; 3153.66,4039.37 v1(3181.39,4028.33) ; C48.2@3167.06,4016.96 v1(3181.39,4028.33) ; C48.2@3167.06,4016.96 3175.17,4033.36 C48.2@3167.06,4016.96 ; C48.2@3167.06,4016.96 3184.87,4021.13 C48.2@3167.06,4016.96 ; C48.2@3167.06,4016.96 v1(3181.39,4028.33) ; C48.2@3167.06,4016.96 3169.09,4040.63 ; C48.2@3167.06,4016.96 3169.09,4040.63 ; 3169.09,4040.63 v1(3181.39,4028.33) ; 3169.09,4040.63 C48.2@3185.59,4035.14 ; 3169.09,4040.63 C48.2@3174.58,4024.13 ; 3169.09,4040.63 v1(3181.39,4028.33) ; 3169.09,4040.63 C48.2@3185.59,4035.14 ; 3169.09,4040.63 C48.2@3174.58,4024.13 ; 3169.09,4040.63 v1(3181.39,4028.33) ; 3169.09,4040.63 C48.2@3185.59,4035.14 ; 3169.09,4040.63 C48.2@3174.58,4024.13 ; 3169.09,4040.63 v1(3181.39,4028.33) ; 3169.09,4040.63 C48.2@3185.59,4035.14 ; 3169.09,4040.63 C48.2@3174.58,4024.13 ; 3169.09,4040.63 v1(3181.39,4028.33) ; 3169.09,4040.63 C48.2@3185.59,4035.14 ; 3169.09,4040.63 C48.2@3174.58,4024.13 ; 3169.09,4040.63 v1(3181.39,4028.33) ; 3169.09,4040.63 C48.2@3185.59,4035.14 ; 3169.09,4040.63 C48.2@3174.58,4024.13 ; 3169.09,4040.63 v1(3181.39,4028.33) ; 3169.09,4040.63 C48.2@3185.59,4035.14 ; 3169.09,4040.63 C48.2@3174.58,4024.13 ; 3169.09,4040.63 v1(3181.39,4028.33) ; 3169.09,4040.63 C48.2@3185.59,4035.14 ; 3169.09,4040.63 C48.2@3174.58,4024.13 ; 3169.09,4040.63 v1(3181.39,4028.33) ; 3169.09,4040.63 C48.2@3185.59,4035.14 ; 3169.09,4040.63 C48.2@3174.58,4024.13 ; 3169.09,4040.63 v1(3181.39,4028.33) ; 3169.09,4040.63 C48.2@3185.59,4035.14 ; 3169.09,4040.63 C48.2@3174.58,4024.13 ; 3169.09,4040.63 C48.2@3185.59,4035.14 ; 3169.09,4040.63 C48.2@3174.58,4024.13 ; 3169.09,4040.63 C48.2@3181.39,4020.3 ; 3169.09,4040.63 3187.89,4026.1 3169.09,4040.63 ; 3169.09,4040.63 C48.2@3173.23,4017.24 ; 3169.09,4040.63 3191,4031.44 3169.09,4040.63 ; 3169.09,4040.63 C48.2@3181.39,4020.3 ; 3169.09,4040.63 C48.2@3173.23,4017.24 ; 3169.09,4040.63 v1(3181.39,4028.33) ; C48.2@3173.23,4017.24 v1(3181.39,4028.33) ; C48.2@3173.23,4017.24 3173.85,4031 C48.2@3173.23,4017.24 ; C48.2@3173.23,4017.24 3186.18,4021.93 C48.2@3173.23,4017.24 ; C48.2@3173.23,4017.24 v1(3181.39,4028.33)
  TOP w8: CON12.8@2192.39,2977.98 2192.39,3035.35 2203.61,3046.57 2212.08,3038.11 CON12.6@2212.08,2977.98 ; CON12.8@2192.39,3000.48 2192.39,3029.48 ; CON12.6@2212.08,3000.48 2212.08,3029.48
  TOP w10: R27.2@2118.69,339.25 R28.2@2123.49,389.08 ; C5.2@2118.69,476.09 R28.2@2122.84,425.94 ; R28.2@2118.76,407.16 R27.2@2131.39,358.88 ; R28.2@2118.76,410.34 C5.2@2131.39,458.63 ; C5.2@2118.83,473.52 R28.2@2132.61,427.66 ; C5.2@2118.79,473.84 R28.2@2131.39,427.81 ; C5.2@2118.97,482.18 C4.2@2135.33,527.38 ; C5.2@2119.45,471.16 R28.2@2142.87,425.62 ; R27.2@2120.68,341 R28.2@2131.39,390.04 ; R27.2@2120.7,341.33 R28.2@2132.71,392.32 ; R27.2@2123.08,343.67 R28.2@2143.77,394.48 ; C4.2@2125.42,545.68 2132.27,505.26 ; C4.2@2125.41,546.78 2124.81,505.63 ; C4.2@2125.47,545.26 2135.33,504.51 ; C4.2@2125.46,545.35 2134.59,505.34 ; C4.2@2125.6,544.69 2139.18,505.78 ; C4.2@2127.55,550.86 C4.2@2119.37,540.14 ; C4.2@2128.06,551.24 C4.2@2118.96,541.58 ; C4.2@2128.37,551.44 C4.2@2118.81,542.41 ; R28.2@2128.79,420.72 2161.58,435 ; C4.2@2129.37,551.9 C4.2@2118.69,544.9 ; C4.2@2130.17,540.37 C4.2@2143.58,540.66 ; C4.2@2130.6,540.3 C4.2@2118.69,544.9 ; C4.2@2131.26,540.25 C4.2@2144.04,542.98 ; C5.2@2131.39,477.5 2131.39,343.94 R27.2@2135.33,340 ; C5.2@2131.39,479.47 C4.2@2135.33,527.38 ; C4.2@2131.57,540.25 C4.2@2144.09,543.64 ; C4.2@2131.79,540.26 C4.2@2118.81,542.41 ; C4.2@2132.18,540.3 C4.2@2118.96,541.58 ; C4.2@2132.29,540.32 C4.2@2144.08,545.14 ; C4.2@2132.85,540.43 C4.2@2119.37,540.14 ; C4.2@2133.31,551.94 C4.2@2144.08,545.14 ; R27.2@2133.36,340 R28.2@2123.49,389.08 ; C4.2@2133.93,551.69 C4.2@2144.09,543.64 ; C4.2@2134.19,551.56 C4.2@2144.04,542.98 ; C4.2@2135.05,551.01 C4.2@2143.58,540.66 ; R28.2@2135.33,408.75 2161.58,435 ; C5.2@2135.33,477.5 2135.33,542.31 v1(2131.39,546.25) ; C4.2@2137.23,544.86 2124.81,505.63 ; R27.2@2137.3,340 R28.2@2143.77,394.48 ; R28.2@2137.3,408.75 2161.58,435 ; C4.2@2137.38,545.94 2132.27,505.26 ; C4.2@2137.35,546.95 2139.18,505.78 ; C4.2@2137.39,546.28 2134.59,505.34 ; C4.2@2137.39,546.38 2135.33,504.51 ; C5.2@2143.55,471.81 R28.2@2122.84,425.94 ; C5.2@2143.99,473.84 R28.2@2131.39,427.81 ; C5.2@2144.03,474.17 R28.2@2132.61,427.66 ; C5.2@2144.04,476.82 R28.2@2142.87,425.62 ; C5.2@2144.09,480.11 C4.2@2135.33,527.38 ; R27.2@2147.17,344.97 R28.2@2123.49,389.08 ; R28.2@2147.79,406.02 R27.2@2131.39,358.88 ; R28.2@2147.79,411.48 C5.2@2131.39,458.63 ; R27.2@2149.64,343.28 R28.2@2131.39,390.04 ; R27.2@2149.75,342.78 R28.2@2132.71,392.32 ; R28.2@2149.89,401.2 2161.58,435 ; R27.2@2151.98,340.23 R28.2@2143.77,394.48 ; 2264.24,450 U1.20@2299.16,449.84 ; U1.20@2323.77,449.84 2323.61,450 2234.17,450 2231.99,447.81 2189.78,447.81 2176.96,435 2161.58,435 ; C4.2@2118.69,544.9 v1(2131.39,546.25) ; C4.2@2118.69,544.9 C5.2@2122.46,491.84 ; C4.2@2118.81,542.41 v1(2131.39,546.25) ; C4.2@2118.81,542.41 C5.2@2132.54,493.47 ; C4.2@2118.96,541.58 v1(2131.39,546.25) ; C4.2@2118.96,541.58 C5.2@2135.33,496.32 ; C4.2@2119.37,540.14 v1(2131.39,546.25) ; C4.2@2119.37,540.14 C5.2@2140.95,497.07 ; C5.2@2122.46,491.84 v1(2131.39,546.25) ; C5.2@2122.46,491.84 2125.42,546.9 C5.2@2122.48,491.88 ; C5.2@2122.46,491.84 2137.25,544.96 C5.2@2122.48,491.88 ; C5.2@2122.46,491.84 C4.2@2131.39,544.28 ; C5.2@2122.46,491.84 C4.2@2143.58,540.66 ; C5.2@2122.48,491.88 v1(2131.39,546.25) ; R28.2@2122.84,425.94 C5.2@2131.39,475.53 ; 2124.81,505.63 v1(2131.39,546.25) ; R27.2@2131.39,358.88 2133.36,408.75 C5.2@2131.39,458.63 ; R28.2@2131.39,390.04 R27.2@2135.33,340 ; R28.2@2131.39,427.81 C5.2@2131.39,475.53 ; C5.2@2131.39,475.53 R28.2@2142.87,425.62 ; C5.2@2131.39,475.53 R28.2@2132.61,427.66 ; C4.2@2131.39,544.28 C5.2@2132.54,493.47 ; C4.2@2131.39,544.28 C5.2@2140.95,497.07 ; C4.2@2131.39,544.28 C5.2@2135.33,496.32 ; v1(2131.39,546.25) 2132.27,505.26 ; v1(2131.39,546.25) C5.2@2132.54,493.47 ; v1(2131.39,546.25) C5.2@2132.54,493.47 ; v1(2131.39,546.25) C4.2@2144.04,542.98 ; v1(2131.39,546.25) 2139.18,505.78 ; v1(2131.39,546.25) C5.2@2140.95,497.07 ; v1(2131.39,546.25) C5.2@2140.95,497.07 ; v1(2131.39,546.25) C4.2@2144.08,545.14 ; v1(2131.39,546.25) C4.2@2143.58,540.66 ; v1(2131.39,546.25) 2134.59,505.34 ; v1(2131.39,546.25) C5.2@2135.33,496.32 ; v1(2131.39,546.25) C5.2@2135.33,496.32 ; v1(2131.39,546.25) C4.2@2144.09,543.64 ; v1(2131.39,546.25) 2135.33,504.51 ; C5.2@2132.54,493.47 2125.41,545.78 C5.2@2132.54,493.47 ; C5.2@2132.54,493.47 2137.39,546.04 C5.2@2132.54,493.47 ; C5.2@2132.54,493.47 C4.2@2144.04,542.98 ; R28.2@2132.71,392.32 R27.2@2135.33,340 ; C5.2@2135.33,496.32 2125.45,545.42 C5.2@2135.33,496.32 ; C5.2@2135.33,496.32 2137.39,546.36 C5.2@2135.33,496.32 ; C5.2@2135.33,496.32 C4.2@2144.09,543.64 ; C5.2@2140.95,497.07 2125.58,544.76 C5.2@2140.95,497.07 ; C5.2@2140.95,497.07 2137.34,547.04 C5.2@2140.95,497.07 ; C5.2@2140.95,497.07 C4.2@2144.08,545.14
  TOP w15: 2203.61,3046.57 2234.61,3077.57 2491.72,3077.57 v3(2679.17,3265.02) 2633.35,3219.2 ; v3(2712.14,2668.81) 3349.57,2668.81 v1(3350.76,2670) 3294.69,2668.81
  TOP w20: C47.2@3181.39,3961.97 3181.39,4016.36 3181.39,3970 v1(3181.39,4028.33) C47.2@3181.39,3961.97
  BOTTOM w10: v1@2125.41,545.81 2131.39,505.25 v1@2137.37,545.81 ; v1(2131.39,546.25) 2131.39,269.37 2195.76,205 3275.76,205 3320.76,250 3320.76,1870 3443.76,1993 3443.76,2194.43 3350.76,2287.43 v1(3350.76,2670) ; v1@3344.78,2669.56 3350.76,2629 v1@3356.74,2669.56
  BOTTOM w15: 2679.17,3206.02 v3(2679.17,3265.02) ; v1(3181.39,4028.33) 3181.39,3935.63 3151.63,3905.87 2821.63,3905.87 2672.26,3756.5 2672.26,3705.27 2679.17,3698.36 v3(2679.17,3265.02) ; 2679.17,2701.78 v3(2712.14,2668.81) 2679.17,2701.78 ; 2679.17,2701.78 v3(2679.17,3265.02)
VDD28_AF: CON12.2 CON12.4 R24.2 U1.10 | length 5369.2
  TOP w8: CON12.4@2231.76,2977.98 2231.76,3020.72 ; CON12.4@2231.76,3000.48 2231.76,3020.72 ; CON12.2@2251.45,2977.98 2251.45,3030.74 2246.61,3035.57 2231.76,3020.72 ; CON12.2@2251.45,3000.48 2251.45,3029.48
  TOP w10: U1.10@2510.78,553.19 2510.78,534.98 ; U1.10@2510.78,602.4 2510.78,630.02 ; R24.2@2613.6,745.14 2578.52,697.76 ; R24.2@2624.22,735 2578.52,697.76 ; R24.2@2626.19,735 2615.76,735 2510.78,630.02 ; R24.2@2632.01,722.55 2578.52,697.76 ; 2680.76,640 2680.76,590 2620.76,530 2515.76,530 2510.78,534.98 ; 2510.78,534.98 U1.10@2510.78,577.79 2510.78,630.02
  TOP w15: 2246.61,3035.57 2488.61,3035.57 v3(2718.61,3265.57) 2672.79,3219.75 ; 2680.76,640 2680.76,770 2708.26,797.5 3103.51,797.5 3295.15,989.14 3295.15,1829.14 3367.26,1901.25 3367.26,2054.73 3405.76,2093.23 3405.76,2540 3350.19,2595.57 v3(2718.61,2595.57)
  BOTTOM w15: v3(2718.61,2595.57) 2753.61,2630.57 2753.61,3230.57 v3(2718.61,3265.57)
VDD28_CAM: C6.2 C7.2 CON12.10 CON12.12 U1.4 U1.32 | length 6363.4
  TOP w8: CON12.12@2153.02,2977.98 2153.02,3046.98 ; CON12.12@2153.02,3000.48 2153.02,3029.48 ; CON12.10@2172.71,2977.98 2172.71,3066.67 ; CON12.10@2172.71,3000.48 2172.71,3029.48
  TOP w10: U1.32@2530.46,277.6 2530.46,260.3 ; U1.32@2530.46,326.81 2530.46,361.73 ; U1.4@2574.76,430.16 2540.92,430.16 ; U1.4@2623.97,430.16 2658.89,430.16 ; C7.2@2683.44,152.52 2695.76,175 ; C7.2@2695.76,149.37 2695.76,175 ; C7.2@2708.08,152.52 2695.76,175 ; C6.2@2758.03,398.03 2708.86,430.16 ; C6.2@2765.76,409.37 2744.97,430.16 ; C6.2@2766.98,421.68 2708.86,430.16 ; 2530.46,260.3 2560.76,230 2607.76,230 2641.76,196 2674.76,196 2695.76,175 ; 2530.46,260.3 U1.32@2530.46,302.2 2530.46,419.7 2540.92,430.16 ; 2540.92,430.16 U1.4@2599.36,430.16 2744.97,430.16 ; 2708.86,430.16 C6.2@2763.79,409.37 ; 2744.97,430.16 C6.2@2763.79,409.37 ; 2744.97,430.16 2771.04,419.82 2744.97,430.16 ; 2744.97,430.16 2752.67,403.2 2744.97,430.16 ; 2744.97,430.16 C6.2@2763.79,409.37
  TOP w15: 2153.02,3046.98 2172.71,3066.67 2226.61,3120.57 2495.83,3120.57 v3(2637.22,3261.96) 2591.4,3216.14 ; v3(2708.61,2630.57) 3343.47,2630.57 3425.76,2548.28 3425.76,1900 3335.76,1810 3335.76,975 3070.76,710 3070.76,375 3010.76,315 2909.42,315 2862.95,361.48 2809.28,361.48 ; C6.2@2760.58,402.07 2809.28,361.48 ; C6.2@2765.76,409.37 2765.76,405 2809.28,361.48 ; C6.2@2767.73,409.37 2809.28,361.48 ; C6.2@2775.96,415.42 2809.28,361.48
  BOTTOM w15: v3(2637.22,3261.96) 2637.22,2701.96 v3(2708.61,2630.57) 2662.79,2676.39
VDD33_A31: CON11.1 CON11.2 | length 188.1
  TOP w10: CON11.2@2816.4,2491.75 CON11.1@2934.52,2491.75 ; CON11.2@2838.9,2491.75 2873.9,2491.75 ; 2877.02,2491.75 CON11.1@2912.02,2491.75
VDD33_LCD: C45.2 C46.2 C79.1 CON11.79 CON11.80 U5.3 U5.7 U5.20 U17.7 | length 7680.1
  TOP w10: CON11.80@2816.4,1724.04 2870.15,1724.04 ; C45.2@2819.93,4094.22 C45.2@2825.7,4083.08 ; C45.2@2821.31,4099.65 C45.2@2832.4,4107.46 ; C45.2@2822.13,4090.85 C45.2@2841.39,4080 ; C45.2@2824.12,4089.86 2866.58,4080.94 ; C45.2@2824.67,4089.73 2865.81,4085.16 ; C45.2@2824.78,4089.71 2876.74,4084.12 ; C45.2@2827.42,4101.4 2876.74,4084.12 ; C45.2@2827.73,4095.63 2884.56,4080 ; C45.2@2827.7,4101.31 2865.81,4085.16 ; C45.2@2828.18,4101.12 2866.58,4080.94 ; C45.2@2830.54,4099.26 C45.2@2841.39,4080 ; C45.2@2831.51,4093.92 C45.2@2832.4,4107.46 ; C45.2@2831.58,4094.17 C45.2@2825.7,4083.08 ; CON11.80@2838.9,1724.04 2870.15,1724.04 ; 2876.27,4080 U5.3@2912.18,4080 ; 2877.02,1724.04 CON11.79@2912.02,1724.04 ; v1@2904.91,4159.06 2949.01,4155.79 ; v1@2907.41,4170.77 2949.01,4155.79 ; U5.3@2924.97,4080 C45.2@2841.39,4080 ; 2925.48,4155.79 U5.20@2961.39,4155.79 2914.97,4155.79 v1(2905.76,4165) 2949.01,4155.79 ; CON11.79@2934.52,1724.04 2870.15,1724.04 ; C46.2@2955.73,3933.58 U5.7@2981.07,3986.62 ; C46.2@2959.78,3928.87 C46.2@2961.7,3941.91 ; C46.2@2959.78,3929.87 C46.2@2961.7,3916.83 ; C46.2@2959.98,3930.97 2974.98,3973.86 ; C46.2@2960.12,3931.41 2977.05,3969.34 ; C46.2@2960.29,3931.83 2980.87,3970.34 ; C46.2@2962.15,3934.16 C46.2@2981.07,3944.68 ; C46.2@2963.79,3929.37 2925.13,3929.37 ; C46.2@2966.37,3923.4 C46.2@2980.35,3927.84 ; C46.2@2967.59,3935.08 C46.2@2980.35,3927.84 ; C46.2@2967.73,3929.37 U5.7@2981.07,3986.62 ; C46.2@2970.55,3925.76 C46.2@2981.07,3944.68 ; C46.2@2970.9,3926.27 C46.2@2961.7,3916.83 ; C46.2@2970.9,3932.47 C46.2@2961.7,3941.91 ; C46.2@2971.52,3927.69 2980.87,3970.34 ; C46.2@2971.64,3928.16 2977.05,3969.34 ; C46.2@2971.7,3928.54 2974.98,3973.86 ; 2981.07,3955.51 U5.7@2981.07,3991.42 ; U5.7@2981.07,4004.21 C46.2@2981.07,3944.68 ; U17.7@3080.8,3574.84 3081.86,3573.78 3229.54,3573.78 3240.76,3585 ; U17.7@3100.48,3574.84 3135.42,3573.78 ; C79.1@3228.35,3611.62 3240.76,3585 ; C79.1@3228.6,3606.77 3201.83,3653.3 ; C79.1@3238.79,3614.37 3201.83,3653.3 ; C79.1@3246.91,3624.16 3201.83,3653.3 ; C79.1@3253.17,3611.62 3240.76,3585 ; C45.2@2825.7,4083.08 v1(2825.76,4095.63) ; C45.2@2825.7,4083.08 2884.56,4080 ; v1(2825.76,4095.63) 2865.81,4085.16 ; v1(2825.76,4095.63) 2866.58,4080.94 ; v1(2825.76,4095.63) C45.2@2832.4,4107.46 ; v1(2825.76,4095.63) 2876.74,4084.12 ; v1(2825.76,4095.63) C45.2@2841.39,4080 ; C45.2@2832.4,4107.46 2884.56,4080 ; 2925.13,3929.37 v1(2965.76,3929.37) ; 2925.13,3929.37 C46.2@2965.32,3935.35 ; 2925.13,3929.37 C46.2@2965.32,3923.39 ; 2925.13,3929.37 v1(2965.76,3929.37) ; 2925.13,3929.37 C46.2@2965.32,3935.35 ; 2925.13,3929.37 C46.2@2965.32,3923.39 ; 2925.13,3929.37 v1(2965.76,3929.37) ; 2925.13,3929.37 C46.2@2965.32,3935.35 ; 2925.13,3929.37 C46.2@2965.32,3923.39 ; 2925.13,3929.37 C46.2@2965.32,3935.35 ; 2925.13,3929.37 C46.2@2965.32,3923.39 ; 2925.13,3929.37 C46.2@2961.7,3941.91 ; 2925.13,3929.37 C46.2@2961.7,3916.83 ; 2925.13,3929.37 2915.76,3920 2915.76,3845 2940.76,3820 3075.76,3820 3110.76,3785 3110.76,3675 3121.39,3664.37 3190.76,3664.37 C79.1@3240.76,3614.37 3240.76,3585 ; 2925.13,3929.37 v1(2965.76,3929.37) ; C46.2@2961.7,3916.83 v1(2965.76,3929.37) ; C46.2@2961.7,3941.91 v1(2965.76,3929.37) ; v1(2965.76,3929.37) 2974.98,3973.86 ; v1(2965.76,3929.37) 2977.05,3969.34 ; v1(2965.76,3929.37) C46.2@2980.35,3927.84 ; v1(2965.76,3929.37) 2980.87,3970.34 ; v1(2965.76,3929.37) C46.2@2981.07,3944.68 ; C46.2@2980.35,3927.84 U5.7@2981.07,3986.62
  TOP w12: 2593.76,3764.04 v1(2585.76,3715) 2593.76,3723 2593.76,3803 v1(2610.76,3820) ; 2870.15,1724.04 v3(2923.61,1670.57) ; v3@2917.57,1665.33 2884.16,1710.03 v3@2928.85,1676.62
  BOTTOM w10: v1@2821.81,4100.14 2857.97,4127.84 v1@2830.27,4091.68 ; v1(2825.76,4095.63) 2884.13,4154 ; v1@2902.4,4169.97 2884.13,4154 ; v1@2906.27,4159.02 2940.76,4165 ; v1@2906.27,4170.98 2940.76,4165 ; v1@2907.8,4159.36 2884.13,4154 ; v1@2959.78,3929.81 2965.76,3970.37 v1@2971.74,3929.81 ; v1(2965.76,3929.37) 2965.76,4140 2940.76,4165 ; 2884.13,4154 v1(2905.76,4165) ; 2884.13,4154 2894.76,4154 v1(2905.76,4165) ; v1(2905.76,4165) 2940.76,4165
  BOTTOM w12: 2583.61,3667.75 v1(2585.76,3715) 2583.61,3712.85 2583.61,1985.57 2548.61,1950.57 2548.61,1869.77 2706.76,1711.63 2706.76,1707.42 2774.18,1640 2893.04,1640 ; v1(2610.76,3820) 2700.76,3820 2810.13,3929.37 v1(2965.76,3929.37) ; v3@2917.46,1675.68 2893.04,1640 ; v3(2923.61,1670.57) 2893.04,1640 ; v3@2928.72,1664.42 2893.04,1640
VDD50_EN: CON10.73 R2.2 | length 4531.5
  TOP w6: v2@719.96,2432.04 753.37,2432.69 ; v2@723.43,2447.54 753.37,2432.69 ; 755.16,2432.69 CON10.73@778.16,2432.69 ; CON10.73@800.66,2432.69 728.07,2432.69 v2(720.76,2440) 753.37,2432.69 ; v1@1507.84,2241.1 1515.76,2269 v1@1523.68,2241.1 ; v1@1520.76,2240 v1(1515.76,2240) 1515.76,2461.87 1633.38,2579.49 2325.8,2579.49 2487.32,2741 3316.19,2741 3539.76,2964.57 3539.76,3061 3523.07,3077.69 3523.07,3177.31 3530.76,3185 3595.76,3185 3600.76,3190 3600.76,3345.43 ; R2.2@3563.57,3361.34 3600.76,3345.43 ; R2.2@3566.38,3366.74 3600.76,3345.43 ; R2.2@3569.93,3371.61 3600.76,3345.43 ; R2.2@3571.19,3375 3600.76,3345.43 ; R2.2@3573.16,3375 3600.76,3345.43 ; R2.2@3576.77,3377.99 3600.76,3345.43 ; R2.2@3581.87,3381.2 3600.76,3345.43 ; R2.2@3587.44,3383.62 3600.76,3345.43
  BOTTOM w6: v2@716.15,2446.54 737.33,2456.57 ; v2(720.76,2440) 737.33,2456.57 ; v2@727.3,2435.39 737.33,2456.57 ; v1@1514.5,2232.1 1486.75,2240.57 ; v1@1514.81,2247.94 1486.75,2240.57 ; v1(1515.76,2240) 1486.75,2240.57 ; v1@1515.76,2240.57 1333.61,2240.57 1117.61,2456.57 737.33,2456.57
VDD_ETHNET_1.8: C38.1 C39.1 U8.3 U8.10 | length 2369.1
  TOP w10: C38.1@1057.43,231.83 1095.31,273.27 ; C38.1@1060.06,222.51 C38.1@1058.61,236.57 ; C38.1@1060.89,227.87 1088.34,260.91 ; C38.1@1061.05,228.09 1092.18,262.66 ; C38.1@1064.92,218.43 C38.1@1079.44,219.42 ; C38.1@1067.73,224.37 1095.31,273.27 ; C38.1@1068.92,229.47 C38.1@1079.44,219.42 ; C38.1@1070.18,228.43 C38.1@1058.61,236.57 ; C38.1@1070.91,221.29 1092.18,262.66 ; C38.1@1071.07,221.58 1088.34,260.91 ; C38.1@1071.16,221.76 1090.34,268.3 ; C38.1@1071.2,221.84 1088.2,265.49 ; 1139.72,318.84 U8.3@1139.72,353.84 ; U8.3@1139.72,368.84 1139.72,317.67 C38.1@1058.61,236.57 ; C38.1@1058.61,236.57 v1(1065.76,224.37) ; v1(1065.76,224.37) 1090.34,268.3 ; v1(1065.76,224.37) 1088.34,260.91 ; v1(1065.76,224.37) C38.1@1079.44,219.42 ; v1(1065.76,224.37) 1092.18,262.66 ; v1(1065.76,224.37) 1088.2,265.49 ; C38.1@1079.44,219.42 1095.31,273.27 ; 1088.2,265.49 1060.69,227.58 1090.34,268.3
  TOP w12: U8.10@1277.51,353.84 1277.51,317.67 ; U8.10@1277.51,368.84 1277.51,317.67 ; C39.1@1507.09,223.75 1510.76,265 ; C39.1@1507.14,223.16 1510.76,245 ; C39.1@1528.2,231.36 1510.76,245 ; C39.1@1529.85,228.25 1510.76,265 ; 1277.51,317.67 1295.18,300 1475.76,300 1510.76,265 ; 1510.76,245 v1(1525.76,225) ; 1510.76,245 v1(1525.76,225) ; 1510.76,245 1518.79,224.37 1510.76,265 ; 1510.76,245 1510.76,265 ; 1510.76,265 v1(1525.76,225) ; 1510.76,265 v1(1525.76,225)
  BOTTOM w10: v1(1065.76,224.37) 1525.13,224.37 v1(1525.76,225) 1484.74,224.37 ; v1@1066.2,218.39 1106.76,224.37 v1@1066.2,230.35 ; v1@1525.23,230.98 1484.74,224.37 ; v1@1525.41,219.01 1484.74,224.37
VDD_TF: CON10.31 J2.37 J2.38 | length 2488.6
  TOP w8: 725.36,2019.31 CON10.31@800.66,2019.31 ; 749.16,2019.31 CON10.31@778.16,2019.31
  TOP w15: J2.38@161.39,2405.96 J2.37@240.13,2405.96 ; J2.38@163.28,2389.95 230.01,2405.96 J2.38@163.28,2421.97 ; J2.37@235.09,2390.65 J2.38@172.28,2419.81 ; J2.37@235.09,2421.27 J2.38@172.28,2392.11 ; J2.37@238.24,2389.95 171.51,2405.96 J2.37@238.24,2421.97 ; J2.37@241.49,2389.9 J2.38@172.28,2392.11 ; J2.37@241.49,2422.02 J2.38@172.28,2419.81 ; J2.37@242.08,2389.96 306.72,2405.96 ; J2.37@242.08,2421.96 306.72,2405.96 ; v1(520.76,2720) 419.04,2720 335.76,2636.72 335.76,2435 306.72,2405.96 ; v3(558.23,2066.19) 633,2066.19 679.87,2019.31 725.36,2019.31 ; J2.38@172.28,2392.11 J2.37@240.13,2405.96 ; J2.38@172.28,2419.81 J2.37@240.13,2405.96 ; J2.37@240.13,2405.96 306.72,2405.96
  BOTTOM w15: v1(520.76,2720) 528.61,2661.56 ; v1@528.61,2720 528.61,2095.81 ; 528.61,2095.81 v3(558.23,2066.19) 528.61,2095.81